# Altium PCB PCB1.PcbDoc
Units mm, origin at the board's own origin, x right, y up, seen from the top; angles counter-clockwise.
Board outline 92.58 x 66.67 mm, 2 copper layers (Top Layer, Bottom Layer); 20 components, 37 nets, 160 pads, 9 vias.
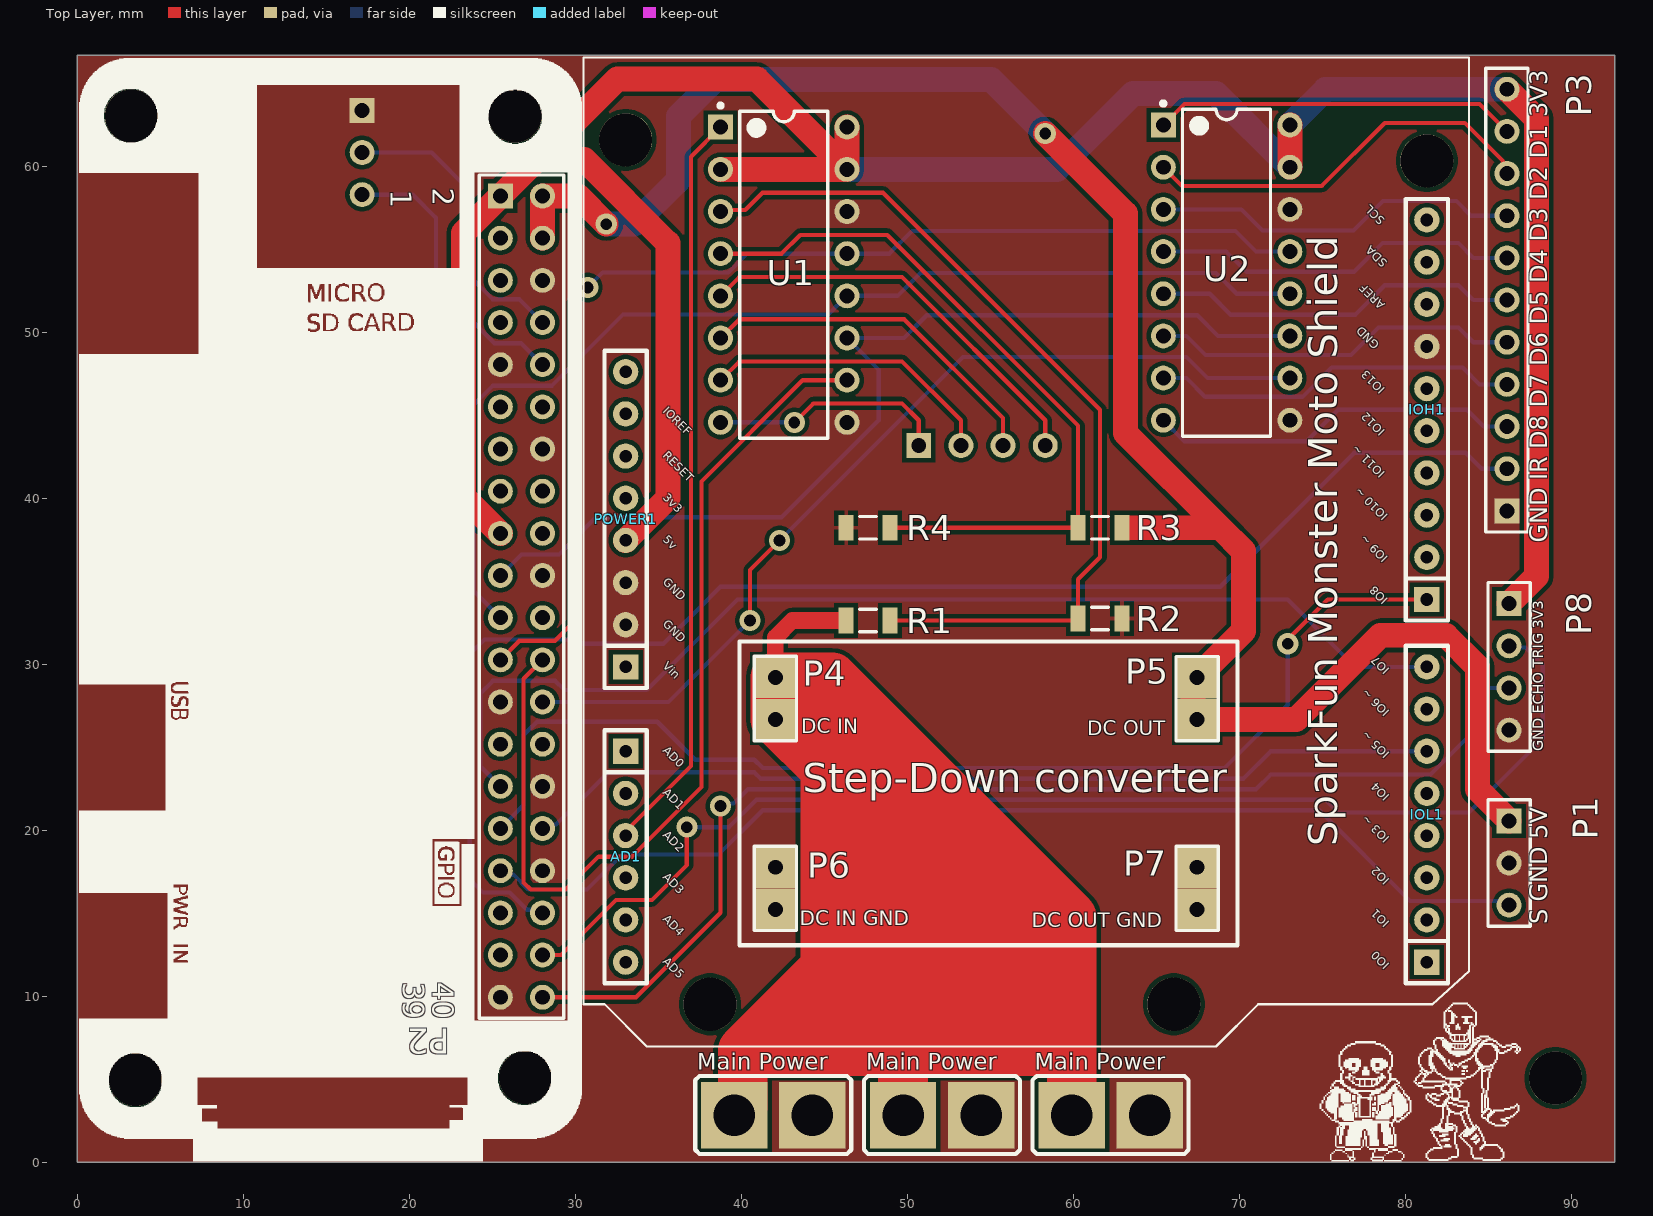
[diagram p0: Top Layer view]
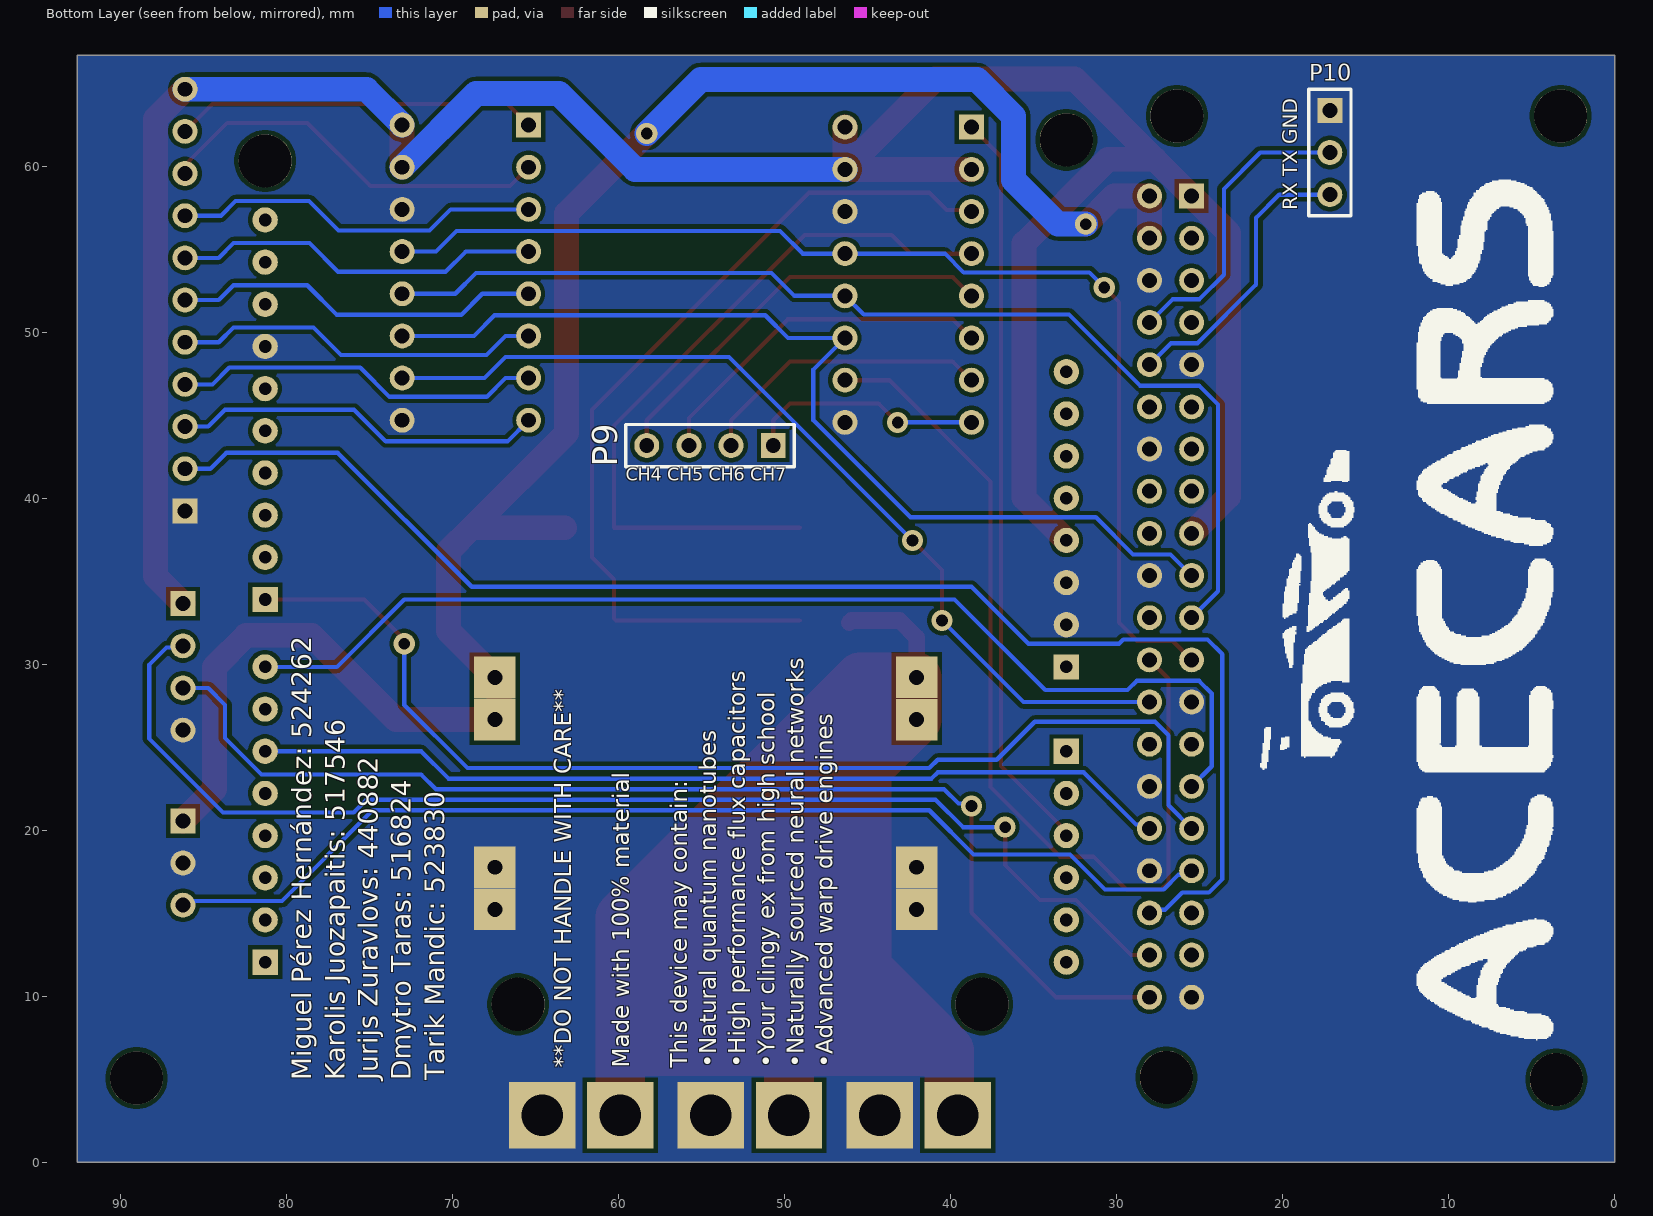
[diagram p1: Bottom Layer view, seen from below]

## Layer stack, top to bottom
Top Solder: solder mask 0.0102, Solder Resist, Dk 3.5
Top Layer: signal copper 0.0356
Dielectric 1: dielectric 0.32, FR-4, Dk 4.8
Bottom Layer: signal copper 0.0356
Bottom Solder: solder mask 0.0102, Solder Resist, Dk 3.5

## Board outline
0,0 92.583,0 92.583,66.675 0,66.675

## Design rules (kind name [scope] priority, off if disabled: settings)
Clearance [All] p1: gap=0.254 ignorepadtopadclearanceinfootprint=TRUE except(0: Arc-Hole Track-Hole SMDPad-Hole THPad-Hole Via-Hole Fill-Hole Poly-Hole Region-Hole Text-Hole)
HoleSize [All] p1: absolutevalues=TRUE maxlimit=999 minlimit=0.025 maxpercent=80.000 minpercent=20.000
MinimumSolderMaskSliver [All] p1: minsoldermaskwidth=0
PolygonConnect [All] p1: thpad.connectstyle=Direct thpad.reliefconductorwidth=0.254 thpad.reliefentries=4 thpad.polygonreliefangle="90 Angle" thpad.airgapwidth=0.254 smdpad.connectstyle=Relief smdpad.reliefconductorwidth=0.254 smdpad.reliefentries=4 smdpad.polygonreliefangle="90 Angle" smdpad.airgapwidth=0.254 via.connectstyle=Direct via.reliefconductorwidth=0.254 via.reliefentries=4 via.polygonreliefangle="90 Angle" via.airgapwidth=0.254
RoutingVias [All] p1: holewidth=0.711 width=1.27 viastyle="Through Hole" minholewidth=0.711 minwidth=1.27 maxholewidth=0.711 maxwidth=1.27
SilkToSilkClearance [All] p1: silktosilkclearance=0
SilkToSolderMaskClearance [IsPad] p1: minsilkscreentomaskgap=0 clearancetoexposedcopper=TRUE
SolderMaskExpansion [All] p1: expansion=0.102 istentingtop=FALSE
Width GND [InNet('GND')] p1: maxlimit=1.5 minlimit=1.5 preferedwidth=1.5 minimp=50.000000 maximp=50.000000 favimp=50.000000
Width 3V3 [InNet('3V3')] p2: maxlimit=1.5 minlimit=1.5 preferedwidth=1.5 minimp=50.000000 maximp=50.000000 favimp=50.000000
Width 5V [InNet('5V')] p3: maxlimit=1.5 minlimit=1.5 preferedwidth=1.5 minimp=50.000000 maximp=50.000000 favimp=50.000000
Width VCC [InNet('VCC')] p4: maxlimit=3 minlimit=1 preferedwidth=3 bottomlayer_minwidth=3 minimp=50.000000 maximp=50.000000 favimp=50.000000
Width IGND [InNet('IGND')] p5: maxlimit=3 minlimit=3 preferedwidth=3 minimp=50.000000 maximp=50.000000 favimp=50.000000
26 further rules are at their usual default settings.

## Components (designator, comment, footprint, x,y, rotation, side; value= is the part's Value field where it differs from the comment)
AD1 "AD" "Header 6x1 8.5mm" 33.02,24.765 r270 top locked
IOH1 "IOH" "Header 10x1 8.5mm" 81.28,33.909 r90 top locked
IOL1 "IOL" "Header 8x1 8.5mm" 81.28,12.065 r90 top locked
P1 "servo" HDR1X3 86.233,20.574 r270 top
P2 "RASPI" HDR2X20 25.472,58.209 r270 top
P3 "HY-S301" HDR1X11 86.106,39.243 r90 top
P4 "DC IN" HDR1X2 42.037,26.67 r90 top locked
P5 "DC OUT" HDR1X2 67.437,26.668 r90 top locked
P6 "DC IN GND" HDR1X2 42.037,15.24 r90 top locked
P7 "DC OUT GND" HDR1X2 67.437,15.24 r90 top locked
P8 "HC-SR04" HDR1X4 86.233,33.655 r270 top
P9 "ADC" HDR1X4 50.673,43.18 r0 bottom
P10 "RX TX GND" HDR1X3 17.145,63.373 r270 bottom
POWER1 "POWER_UNO" "Header 8x1 8.5mm" 33.02,29.845 r90 top locked
R1 "33K" RESC3216X70X50LL05T20 47.625,32.639 r0 top
R2 "18K" RESC3216X70X50LL05T20 61.595,32.766 r0 top
R3 "39K" RESC3216X70X50LL05T20 61.595,38.227 r180 top
R4 "68K" RESC3216X70X50LL05T20 47.625,38.227 r180 top
U1 "MCP3008-I/P" PDIP300-P16 42.545,53.467 r0 top
U2 "MCP3008-I/P" PDIP300-P16 69.215,53.594 r0 top

## Footprints (in the part's own frame and the unit in brackets; to place one, negate y for a bottom-side part, rotate by r counter-clockwise, add the part's x,y. Pads: shape width x height; smd on the part's side, far side on the other; paste and mask are expansions set on the pad)
HDR1X2 [mm] "Connector; Header; 2 Position"
  rect 2.5x2.5 hole 0.9: 1(0,0) 2(2.54,0)
  silkscreen extent -1.27,-1.27 3.81,1.27
HDR1X3 [mm] "Connector; Header; 3 Position"
  rect 1.5x1.5 hole 0.9: 1(0,0)
  round 1.5 hole 0.9: 2(2.54,0) 3(5.08,0)
  silkscreen extent -1.27,-1.27 6.35,1.27
HDR1X4 [mm] "Connector; Header; 4 Position"
  rect 1.5x1.5 hole 0.9: 1(0,0)
  round 1.5 hole 0.9: 2(2.54,0) 3(5.08,0) 4(7.62,0)
  silkscreen extent -1.27,-1.27 8.89,1.27
HDR1X11 [mm] "Connector; Header; 11 Position"
  rect 1.5x1.5 hole 0.9: 1(0,0)
  round 1.5 hole 0.9: 2(2.54,0) 3(5.08,0) 4(7.62,0) 5(10.16,0) 6(12.7,0) 7(15.24,0) 8(17.78,0) 9(20.32,0) 10(22.86,0) 11(25.4,0)
  silkscreen extent -1.27,-1.27 26.67,1.27
HDR2X20 [mm] "Connector; Header; 20x2 Position"
  rect 1.5x1.5 hole 0.9: 1(0,0)
  round 1.5 hole 0.9: 2(0,2.54) 3(2.54,0) 4(2.54,2.54) 5(5.08,0) 6(5.08,2.54) 7(7.62,0) 8(7.62,2.54) 9(10.16,0) 10(10.16,2.54) 11(12.7,0) 12(12.7,2.54) 13(15.24,0) 14(15.24,2.54) 15(17.78,0) 16(17.78,2.54) 17(20.32,0) 18(20.32,2.54) 19(22.86,0) 20(22.86,2.54) 21(25.4,0) 22(25.4,2.54) 23(27.94,0) 24(27.94,2.54) 25(30.48,0) 26(30.48,2.54) 27(33.02,0) 28(33.02,2.54) 29(35.56,0) 30(35.56,2.54) 31(38.1,0) 32(38.1,2.54) 33(40.64,0) 34(40.64,2.54) 35(43.18,0) 36(43.18,2.54) 37(45.72,0) 38(45.72,2.54) 39(48.26,0) 40(48.26,2.54)
  silkscreen extent -1.27,-1.27 49.53,3.81
"Header 6x1 8.5mm" [mil] "Stackable 6 pin header"
  rect 60x60 hole 30: 1(0,0)
  round 60 hole 30: 2(100,0) 3(200,0) 4(300,0) 5(400,0) 6(500,0)
  silkscreen extent -50,-50 550,50, body extent -50,-50 550,50, height 335
"Header 8x1 8.5mm" [mil] "Stackable 8 pin header"
  rect 60x60 hole 30: 1(0,0)
  round 60 hole 30: 2(100,0) 3(200,0) 4(300,0) 5(400,0) 6(500,0) 7(600,0) 8(700,0)
  silkscreen extent -50,-50 750,50, body extent -50,-50 750,50, height 335
"Header 10x1 8.5mm" [mil] "Stackable 10 pin header"
  rect 60x60 hole 30: 1(0,0)
  round 60 hole 30: 2(100,0) 3(200,0) 4(300,0) 5(400,0) 6(500,0) 7(600,0) 8(700,0) 9(800,0) 10(900,0)
  silkscreen extent -50,-50 950,50, body extent -50,-50 950,50, height 335
PDIP300-P16 [mm] "DIP, 16-Leads, Row Spacing 7.62mm, Pitch 2.54mm, Body 19.2x6.6mm"
  rect 1.5x1.5 hole 0.9: 1(-3.81,8.89)
  round 1.5 hole 0.9: 2(-3.81,6.35) 3(-3.81,3.81) 4(-3.81,1.27) 5(-3.81,-1.27) 6(-3.81,-3.81) 7(-3.81,-6.35) 8(-3.81,-8.89) 9(3.81,-8.89) 10(3.81,-6.35) 11(3.81,-3.81) 12(3.81,-1.27) 13(3.81,1.27) 14(3.81,3.81) 15(3.81,6.35) 16(3.81,8.89)
  silkscreen extent -3.93,-9.85 2.65,10.31, body extent -3.55,-9.85 3.55,9.85, height 5.34
RESC3216X70X50LL05T20 [mm] "Chip Resistor, 2-Leads, Body 3.20x1.60mm, IPC High Density"
  rect 0.9x1.55 smd: 1(-1.325,0) 2(1.325,0)
  silkscreen extent -0.5,-0.67 0.5,0.67, body extent -1.63,-0.82 1.62,0.82, height 0.7

## Part data
AD1: Supplier Part Number 1=2699089, Supplier 1=Arrow, Supplier 2=Digi-Key, Supplier 3=Arrow, Supplier 4=Arrow, Supplier Part Number 2=SAM1198-06-ND, Supplier Part Number 3=2699088, Supplier Part Number 4=2699075
IOH1: Supplier Part Number 1=2698803S4475693N1004, Supplier 1=Arrow, Supplier 2=Digi-Key, Supplier 3=Arrow, Supplier Part Number 2=SAM1198-10-ND, Supplier Part Number 3=2698789
IOL1 POWER1: Supplier Part Number 1=SAM1198-08-ND, Supplier 1=Digi-Key, Supplier 2=Arrow, Supplier 3=Arrow, Supplier 4=Arrow, Supplier Part Number 2=2698939, Supplier Part Number 3=2698940, Supplier Part Number 4=2698925
P1 P10: library part "Header 3", "Header, 3-Pin", LatestRevisionDate=17-Jul-2002, LatestRevisionNote="Re-released for DXP Platform.", Publisher="Altium Limited"
P2: library part "Header 20X2", "Header, 20-Pin, Dual row", LatestRevisionDate=17-Jul-2002, LatestRevisionNote="Re-released for DXP Platform.", Publisher="Altium Limited"
P3: library part "Header 11", "Header, 11-Pin", LatestRevisionDate=17-Jul-2002, LatestRevisionNote="Re-released for DXP Platform.", Publisher="Altium Limited"
P4 P5 P6 P7: library part "Header 2", "Header, 2-Pin", LatestRevisionDate=17-Jul-2002, LatestRevisionNote="Re-released for DXP Platform.", Publisher="Altium Limited"
P8 P9: library part "Header 4", "Header, 4-Pin", LatestRevisionDate=17-Jul-2002, LatestRevisionNote="Re-released for DXP Platform.", Publisher="Altium Limited"
R1: library part CMP-2003-00019-1, "100K", Manufacturer=Panasonic, Part Number=ERJ-8ENF1003V
R2 R4: library part CMP-2003-00835-1, Manufacturer=Panasonic, Part Number=ERJ8ENF3302V
R3: library part CMP-2003-00571-1, Manufacturer=Panasonic, Part Number=ERJ-8GEYJ183V
U1 U2: library part CMP-0188-00184-2, "2.7V 4-Channel/8-Channel 10-Bit A/D Converters with SPI Serial Interface, 16-Pin PDIP, Industrial Temperature", Code_JEDEC=MS-001-BB, ComponentLink1Description="Manufacturer URL", ComponentLink1URL=http://www.microchip.com/, ComponentLink2Description=Datasheet, ComponentLink2URL=http://ww1.microchip.com/downloads/en/DeviceDoc/21295d.pdf, ComponentLink3Description="Package Specification", ComponentLink3URL=http://www.microchip.com/stellent/groups/techpub_sg/documents/packagingspec/en012702.pdf, DatasheetVersion="revD, Dec-2008", PackageDescription="16-Lead Plastic Dual In-Line (P) - 300 mil Body [PDIP]", PackageReference=PDIP300-P16, PackageVersion="revBB, Aug-2009", RevisionNote="URLs added."

## Free pads (board coordinates)
  round 3.2 hole 3.2: 0(3.247,63.035) 0(3.501,4.996) 0(26.361,63.035) 0(26.996,5.123) 0(33.02,61.595) 0(38.1,9.525) 0(66.04,9.525) 0(81.28,60.325) 0(89.027,5.08)
  rect 4x4 hole 2.5: 3(44.266,2.845) 3(54.426,2.845) 3(64.586,2.845) 4(39.567,2.845) 4(49.727,2.845) 4(59.887,2.845)

## Via types
v1: diameter 1.27, hole 0.711, Top Layer to Bottom Layer, 9 vias

## Nets (pads, with @x,y where several pads share a name; then routed paths per layer and width w, separated by ;. In a path a pad name is that pad's centre, name@x,y a point inside that pad or via, vN(x,y) a via of type N, cw(c..) or ccw(c..) an arc to the next point about the centre after c; other vN are vias at no path point)
3V3: P2.1 P2.17 P3.11 P8.1 POWER1.4 U1.2 U1.15 U1.16 U2.15 U2.16 | length 166.6
  Top Layer w1.5: P2.17 23.241,40.12 23.241,55.978 27.69,60.427 ; POWER1.4 33.02,37.471 35.56,40.011 35.56,55.372 30.506,60.427 27.69,60.427 ; U1.2 U1.15 ; U1.16 U1.15 ; U2.15 U2.16 ; P3.11 87.884,62.865 87.884,35.306 P8.1 ; 27.69,60.427 32.516,65.253 40.919,65.253 U1.15
  Bottom Layer w1.5: U1.15 59.004,59.817 63.576,64.389 68.58,64.389 U2.15 ; U2.16 75.184,64.643 P3.11
5V: P1.1 P2.2 P2.4 P5.1 P5.2 R3.1 | length 118
  Top Layer w1.5: P2.4 P2.2 30.158,58.209 v1(31.852,56.515) ; v1(58.293,61.976) 63.119,57.15 63.119,43.942 68.834,38.227 ; R3.1@63.246,38.227 68.834,38.227 ; P5.1@67.183,26.797 P5.2@67.183,29.337 ; P5.2 70.231,32.002 70.231,36.83 68.834,38.227 ; P5.1@67.761,26.344 P5.1 73.404,26.668 78.486,31.75 82.423,31.75 84.328,29.845 84.328,22.479 P1.1
  Bottom Layer w1.5: v1(31.852,56.515) 33.528,56.515 36.195,59.182 36.195,63.017 38.405,65.227 55.042,65.227 v1(58.293,61.976)
CLK: P2.23 U1.13 U2.13 | length 70.1
  Top Layer w0.254: P2.23 26.627,31.424 28.757,31.424 29.845,32.512 29.845,51.816 v1(30.734,52.705)
  Bottom Layer w0.254: v1(30.734,52.705) 31.635,53.606 39.203,53.606 40.334,54.737 U1.13 48.895,54.737 50.267,56.109 69.748,56.109 70.993,54.864 U2.13
CRS1: AD1.3 U1.1 | length 45
  Top Layer w0.254: AD1.3 33.02,19.939 36.957,23.876 36.957,60.579 U1.1
CRS2: AD1.4
CS0: P2.24 U1.10 | length 57
  Top Layer w0.254: P2.24 26.873,29.13 26.873,16.866 27.305,16.434 29.413,16.434 31.394,18.415 33.401,18.415 37.592,22.606 37.592,41.021 43.688,47.117 U1.10
CS1: P2.26 U2.10 | length 55.9
  Top Layer w0.254: v1(40.513,32.639) 40.513,35.687 v1(42.291,37.465)
  Bottom Layer w0.254: P2.26 35.603,27.729 v1(40.513,32.639) ; v1(42.291,37.465) 53.34,48.514 66.802,48.514 68.072,47.244 U2.10
D1: P3.10 U2.1 | length 21.9
  Top Layer w0.254: U2.1 66.675,63.754 84.455,63.754 P3.10
D2: P3.9 U2.2 | length 24.3
  Top Layer w0.254: U2.2 66.536,58.813 74.942,58.813 78.74,62.611 83.566,62.611 85.868,60.309 85.868,59.801 P3.9
D3: P3.8 U2.3 | length 22.3
  Bottom Layer w0.254: U2.3 70.104,57.404 71.374,56.134 76.86,56.134 78.638,57.912 83.058,57.912 83.947,57.023 P3.8
D4: P3.7 U2.4 | length 22.3
  Bottom Layer w0.254: U2.4 69.19,54.864 70.409,53.645 76.886,53.645 78.613,55.372 83.185,55.372 84.074,54.483 P3.7
D5: P3.6 U2.5 | length 22.3
  Bottom Layer w0.254: U2.5 68.199,52.324 69.469,51.054 76.962,51.054 78.74,52.832 83.185,52.832 84.074,51.943 P3.6
D6: P3.5 U2.6 | length 22.2
  Bottom Layer w0.254: U2.6 66.802,49.784 67.945,48.641 76.708,48.641 78.359,50.292 83.185,50.292 84.074,49.403 P3.5
D7: P3.4 U2.7 | length 22.3
  Bottom Layer w0.254: U2.7 66.802,47.244 67.933,46.113 73.787,46.113 75.553,47.879 83.439,47.879 84.455,46.863 P3.4
D8: P3.3 U2.8 | length 22.4
  Bottom Layer w0.254: U2.8 66.675,43.434 74.017,43.434 75.922,45.339 83.693,45.339 84.709,44.323 P3.3
ECHO: P2.40 P8.3 | length 70.9
  Top Layer w0.254: P2.40 33.647,9.949 38.735,15.037 v1(38.735,21.463)
  Bottom Layer w0.254: v1(38.735,21.463) 38.882,21.61 39.517,21.61 40.386,22.479 70.993,22.479 71.882,23.368 81.499,23.368 83.693,25.562 83.693,27.559 84.709,28.575 P8.3
GND: IOH1.7 P1.2 P2.6 P2.9 P2.14 P2.20 P2.25 P2.30 P2.34 P2.39 P3.1 P6.1 P6.2 P7.1 P7.2 P8.4 P10.1 pad.3 POWER1.2 POWER1.3 R2.2 R4.2 U1.9 U1.14 U2.9 U2.14
INA1: IOL1.8 P2.29 | length 67.6
  Bottom Layer w0.254: P2.29 24.257,23.864 24.257,28.245 25.019,29.007 28.778,29.007 29.337,28.448 34.29,28.448 39.751,33.909 72.898,33.909 76.962,29.845 IOL1.8
INA2: IOL1.5
INB1: IOH1.1 P2.31 | length 68.6
  Top Layer w0.254: v1(72.898,31.242) 72.898,31.496 75.311,33.909 IOH1.1
  Bottom Layer w0.254: P2.31 26.873,21.51 26.873,25.73 27.686,26.543 34.925,26.543 37.211,24.257 40.767,24.257 41.275,23.749 69.088,23.749 72.898,27.559 v1(72.898,31.242)
INB2: IOH1.2
IR: P2.36 P3.2 | length 86.9
  Bottom Layer w0.254: P2.36 27.822,15.219 27.072,15.219 26.035,16.256 24.435,16.256 23.622,17.069 23.622,30.607 24.511,31.496 29.591,31.496 29.845,31.242 35.306,31.242 38.735,34.671 68.834,34.671 76.911,42.748 83.617,42.748 84.582,41.783 P3.2
MISO: P2.21 U1.12 U2.12 | length 66.4
  Bottom Layer w0.254: P2.21 23.876,34.405 23.876,45.644 25.019,46.787 28.575,46.787 32.854,51.066 45.224,51.066 U1.12 49.403,52.197 50.775,53.569 68.58,53.569 69.825,52.324 U2.12
MOSI: P2.19 U1.11 U2.11 | length 60.2
  Bottom Layer w0.254: P2.19 26.746,36.623 29.007,36.623 31.242,38.858 42.414,38.858 48.26,44.704 48.26,47.752 U1.11 49.784,49.657 51.156,51.029 67.462,51.029 68.707,49.784 U2.11
NetP2_8: P2.8 P10.2 | length 18.1
  Bottom Layer w0.254: P10.2 21.336,60.833 23.531,58.638 23.531,53.471 25.004,51.998 26.603,51.998 P2.8
NetP2_10: P2.10 P10.3 | length 17.5
  Bottom Layer w0.254: P10.3 20.193,58.293 21.59,56.896 21.59,52.872 25.119,49.343 26.718,49.343 P2.10
NetP9_1: P9.1 U1.8 | length 14.4
  Top Layer w0.254: v1(43.18,44.577) 44.323,45.72 49.657,45.72 50.673,44.704 P9.1
  Bottom Layer w0.254: U1.8 v1(43.18,44.577)
NetP9_2: P9.2 U1.7 | length 17.9
  Top Layer w0.254: U1.7 39.866,48.248 49.669,48.248 53.213,44.704 P9.2
NetP9_3: P9.3 U1.6 | length 21.6
  Top Layer w0.254: U1.6 39.866,50.788 49.796,50.788 55.753,44.831 P9.3
NetP9_4: P9.4 U1.5 | length 25.1
  Top Layer w0.254: U1.5 39.866,53.328 49.669,53.328 58.293,44.704 P9.4
PWM1: IOL1.6 P2.32 | length 55.5
  Bottom Layer w0.254: P2.32 28.251,20.347 28.826,20.347 31.973,23.495 40.767,23.495 41.148,23.114 70.231,23.114 71.882,24.765 IOL1.6
PWM2: IOL1.7
SPWM: P1.3 P2.33 | length 65.6
  Bottom Layer w0.254: P2.33 25.711,17.331 26.26,17.331 27.153,16.438 30.696,16.438 32.801,18.542 38.608,18.542 41.275,21.209 74.803,21.209 80.268,15.744 80.374,15.744 81.171,15.744 ccw(c81.17,15.998) 81.189,15.744 cw(c81.28,14.605) 81.372,15.744 ccw(c81.39,15.998) 81.388,15.744 85.983,15.744 86.058,15.669 P1.3
TRIG: P2.38 P8.2 | length 74.6
  Top Layer w0.254: P2.38 29.126,12.489 32.439,15.802 34.598,15.802 36.703,17.907 v1(36.703,20.193)
  Bottom Layer w0.254: v1(36.703,20.193) 39.243,20.193 40.894,21.844 75.184,21.844 75.946,21.082 83.82,21.082 88.265,25.527 88.265,29.972 87.215,31.022 86.326,31.022 P8.2
VCC: P4.1 P4.2 pad.4 R1.1 | length 95.4
  Top Layer w1: P4.2 42.037,31.623 43.053,32.639 45.974,32.639 R1.1@46.101,32.512
  Top Layer w3: pad.4@39.567,2.845 40.067,3.345 40.067,6.749 45.041,11.723 45.041,23.666 ; pad.4@49.727,2.845 49.727,18.98 45.041,23.666 ; pad.4@59.887,2.845 59.887,14.789 45.466,29.21 42.291,29.21 P4.2 P4.1 45.041,23.666
VD5V: R3.2 R4.1 U1.4 | length 44.1
  Top Layer w0.254: U1.4 42.408,54.737 43.539,55.868 48.78,55.868 60.27,44.378 R3.2 R4.1@49.077,38.227
VDVCC: R1.2 R2.1 U1.3 | length 53.1
  Top Layer w0.254: U1.3 38.828,57.37 40.225,57.37 41.263,58.408 48.526,58.408 61.595,45.339 61.595,36.449 60.27,35.124 R2.1 60.143,32.639 R1.2@49.077,32.639
pads on no net: AD1.1 AD1.2 AD1.5 AD1.6 IOH1.3 IOH1.4 IOH1.5 IOH1.6 IOH1.8 IOH1.9 IOH1.10 IOL1.1 IOL1.2 IOL1.3 IOL1.4 P2.3 P2.5 P2.7 P2.11 P2.12 P2.13 P2.15 P2.16 P2.18 P2.22 P2.27 P2.28 P2.35 P2.37 POWER1.1 POWER1.5 POWER1.6 POWER1.7 POWER1.8

## Polygon pours and split planes (outlines as drawn)
GND on Top Layer "GND_L01_P000" (solid, remove dead copper, pour order 0): 0,66.675 0,0 92.583,0 92.583,66.675
GND on Bottom Layer "GND_L02_P001" (solid, remove dead copper, pour order 1): 0,66.675 92.583,66.675 92.583,0 0,0

## Other copper
Top Layer:
  region net VCC: 41.172,5.207 58.674,5.207 58.674,15.6 43.307,30.099 44.282,14.273

## Silkscreen, mask and mechanical layers (free items; w line width, h text height)
Top Overlay:
  drawing of 273 lines, arcs and shapes, not listed
  text "SCL" at 78.814,56.769 h0.51 r135
  text "SDA" at 78.941,54.229 h0.51 r135
  text "AREF" at 78.814,51.689 h0.51 r135
  text "GND" at 78.486,49.276 h0.51 r135
  text "IO13" at 78.814,46.609 h0.51 r135
  text "IOREF" at 35.232,45.212 h0.51 r315
  text "IO12" at 78.814,44.069 h0.51 r135
  text "RESET" at 35.232,42.545 h0.51 r315
  text "IO11 ~" at 78.814,41.529 h0.51 r135
  text "3v3" at 35.232,40.005 h0.51 r315
  text "IO10 ~" at 78.994,38.989 h0.51 r135
  text "5v" at 35.232,37.465 h0.51 r315
  text "GND IR D8 D7 D6 D5 D4 D3 D2 D1 3V3" at 88.88,37.338 h1.8 r90
  text "IO9 ~" at 78.994,36.449 h0.51 r135
  text "GND" at 35.232,34.925 h0.51 r315
  text "IO8" at 78.994,33.909 h0.51 r135
  text "GND" at 35.232,32.385 h0.51 r315
  text "Vin" at 35.232,29.845 h0.51 r315
  text "IO7" at 79.068,29.718 h0.51 r135
  text "IO6 ~" at 79.068,27.178 h0.51 r135
  text "AD0" at 35.232,24.765 h0.51 r315
  text "GND ECHO TRIG 3V3" at 88.507,24.765 h1.1 r90
  text "IO5 ~" at 79.068,24.638 h0.51 r135
  text "AD1" at 35.232,22.225 h0.51 r315
  text "IO4" at 79.068,22.098 h0.51 r135
  text "Step-Down converter" at 43.688,21.709 h3
  text "AD2" at 35.232,19.685 h0.51 r315
  text "IO3 ~" at 79.068,19.558 h0.51 r135
  text "SparkFun Monster Moto Shield" at 76.454,19.05 h3 r90
  text "AD3" at 35.232,17.145 h0.51 r315
  text "IO2" at 79.068,17.018 h0.51 r135
  text "AD4" at 35.232,14.605 h0.51 r315
  text "IO1" at 79.068,14.478 h0.51 r135
  text "S GND 5V" at 88.88,14.351 h1.8 r90
  text "AD5" at 35.232,12.065 h0.51 r315
  text "IO0" at 79.068,11.938 h0.51 r135
  text "Main Power" at 37.338,5.588 h1
  text "Main Power" at 47.498,5.588 h1
  text "Main Power" at 57.658,5.588 h1
Bottom Overlay:
  drawing of 16 lines, arcs and shapes, not listed
  text "CH4 CH5 CH6 CH7" at 59.563,40.781 h1.3
  text "**DO NOT HANDLE WITH CARE** /  / Made with 100% material /  / This device may contain: / •Natural quantum nanotubes / •High performance flux capacitors / •Your clingy ex from high school / •Naturally sourced neural networks / •Advanced warp drive engines" at 46.736,5.715 h1.75 r270
  text "Miguel Pérez Hernández: 524262 / Karolis Juozapaitis: 517546 / Jurijs Zuravlovs: 440882 / Dmytro Taras: 516824 / Tarik Mandic: 523830" at 70.104,4.953 h2 r270
Board Outline:
  circle w0.127: c66.04,9.525 r1.6
  circle w0.127: c38.1,9.525 r1.6
  circle w0.127: c81.28,60.325 r1.6
  lines w0.001: 0,0 0,66.675 ; 0,0 92.583,0 ; 0,0 0,66.675 ; 0,0 92.583,0 ; 0,66.675 92.583,66.675 ; 0,66.675 92.583,66.675 ; 92.583,0 92.583,66.675 ; 92.583,0 92.583,66.675

## Text inside footprints (layer, text, board x,y; h text height)
P2: Top Overlay "1" at 18.868,58.59 h1.27 r270; Top Overlay "2" at 21.408,58.717 h1.27 r270; Top Overlay "40" at 21.408,10.838 h1.27 r270; Top Overlay "39" at 19.63,10.838 h1.27 r270